# Altium PCB PCB-verbesserung_2025-05-29.pcbdoc
Units mil, origin at the board's own origin, x right, y up, seen from the top; angles counter-clockwise.
Board outline 3544.31 x 3372.2 mil, 2 copper layers (Top Layer, Bottom Layer); 8 components, 26 nets, 80 pads, 3 vias.
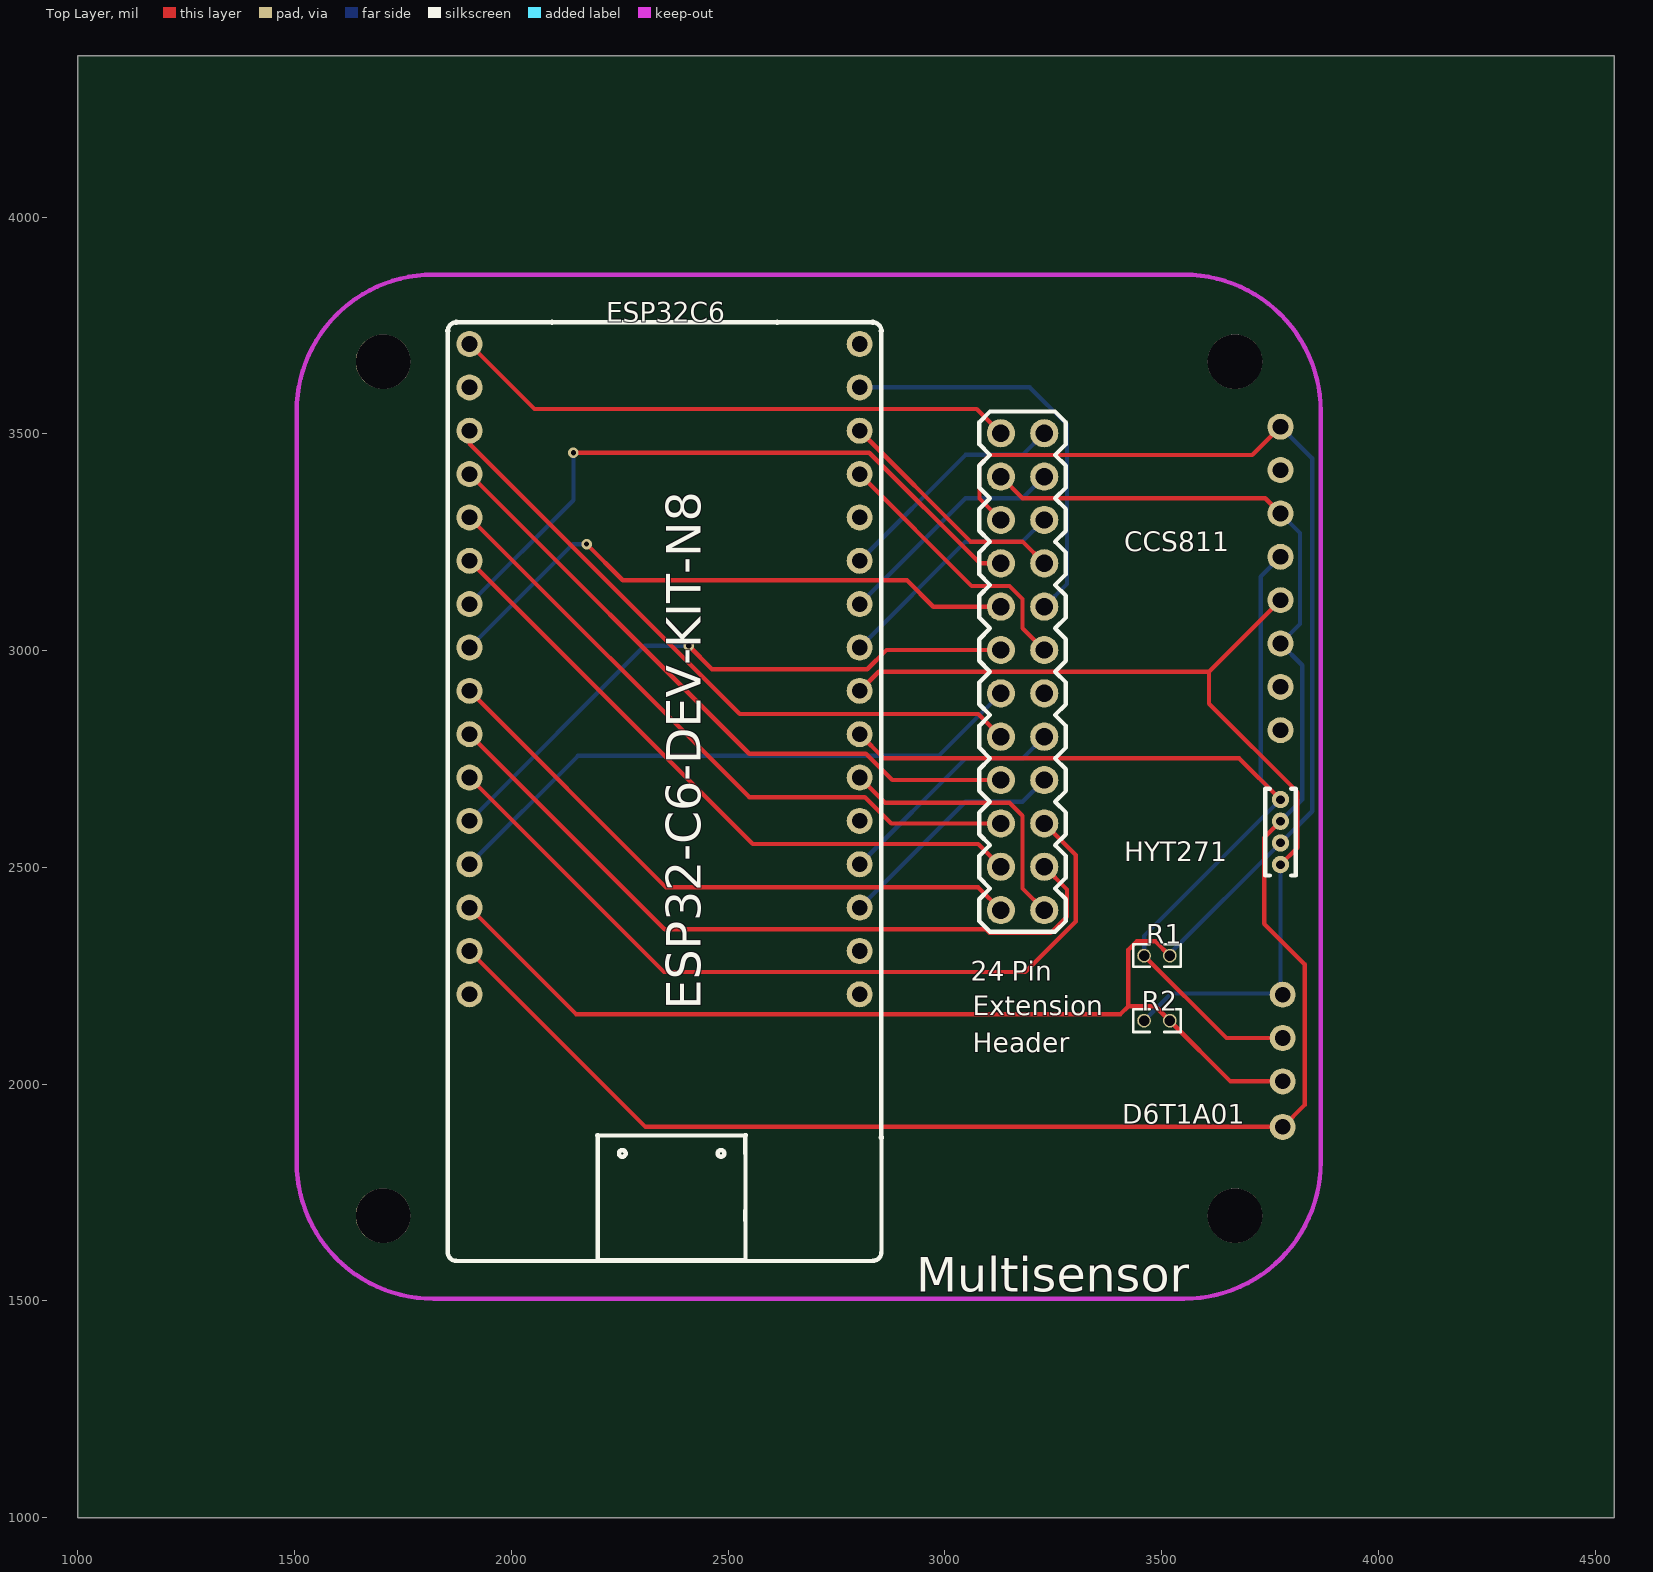
[diagram p0: Top Layer view]
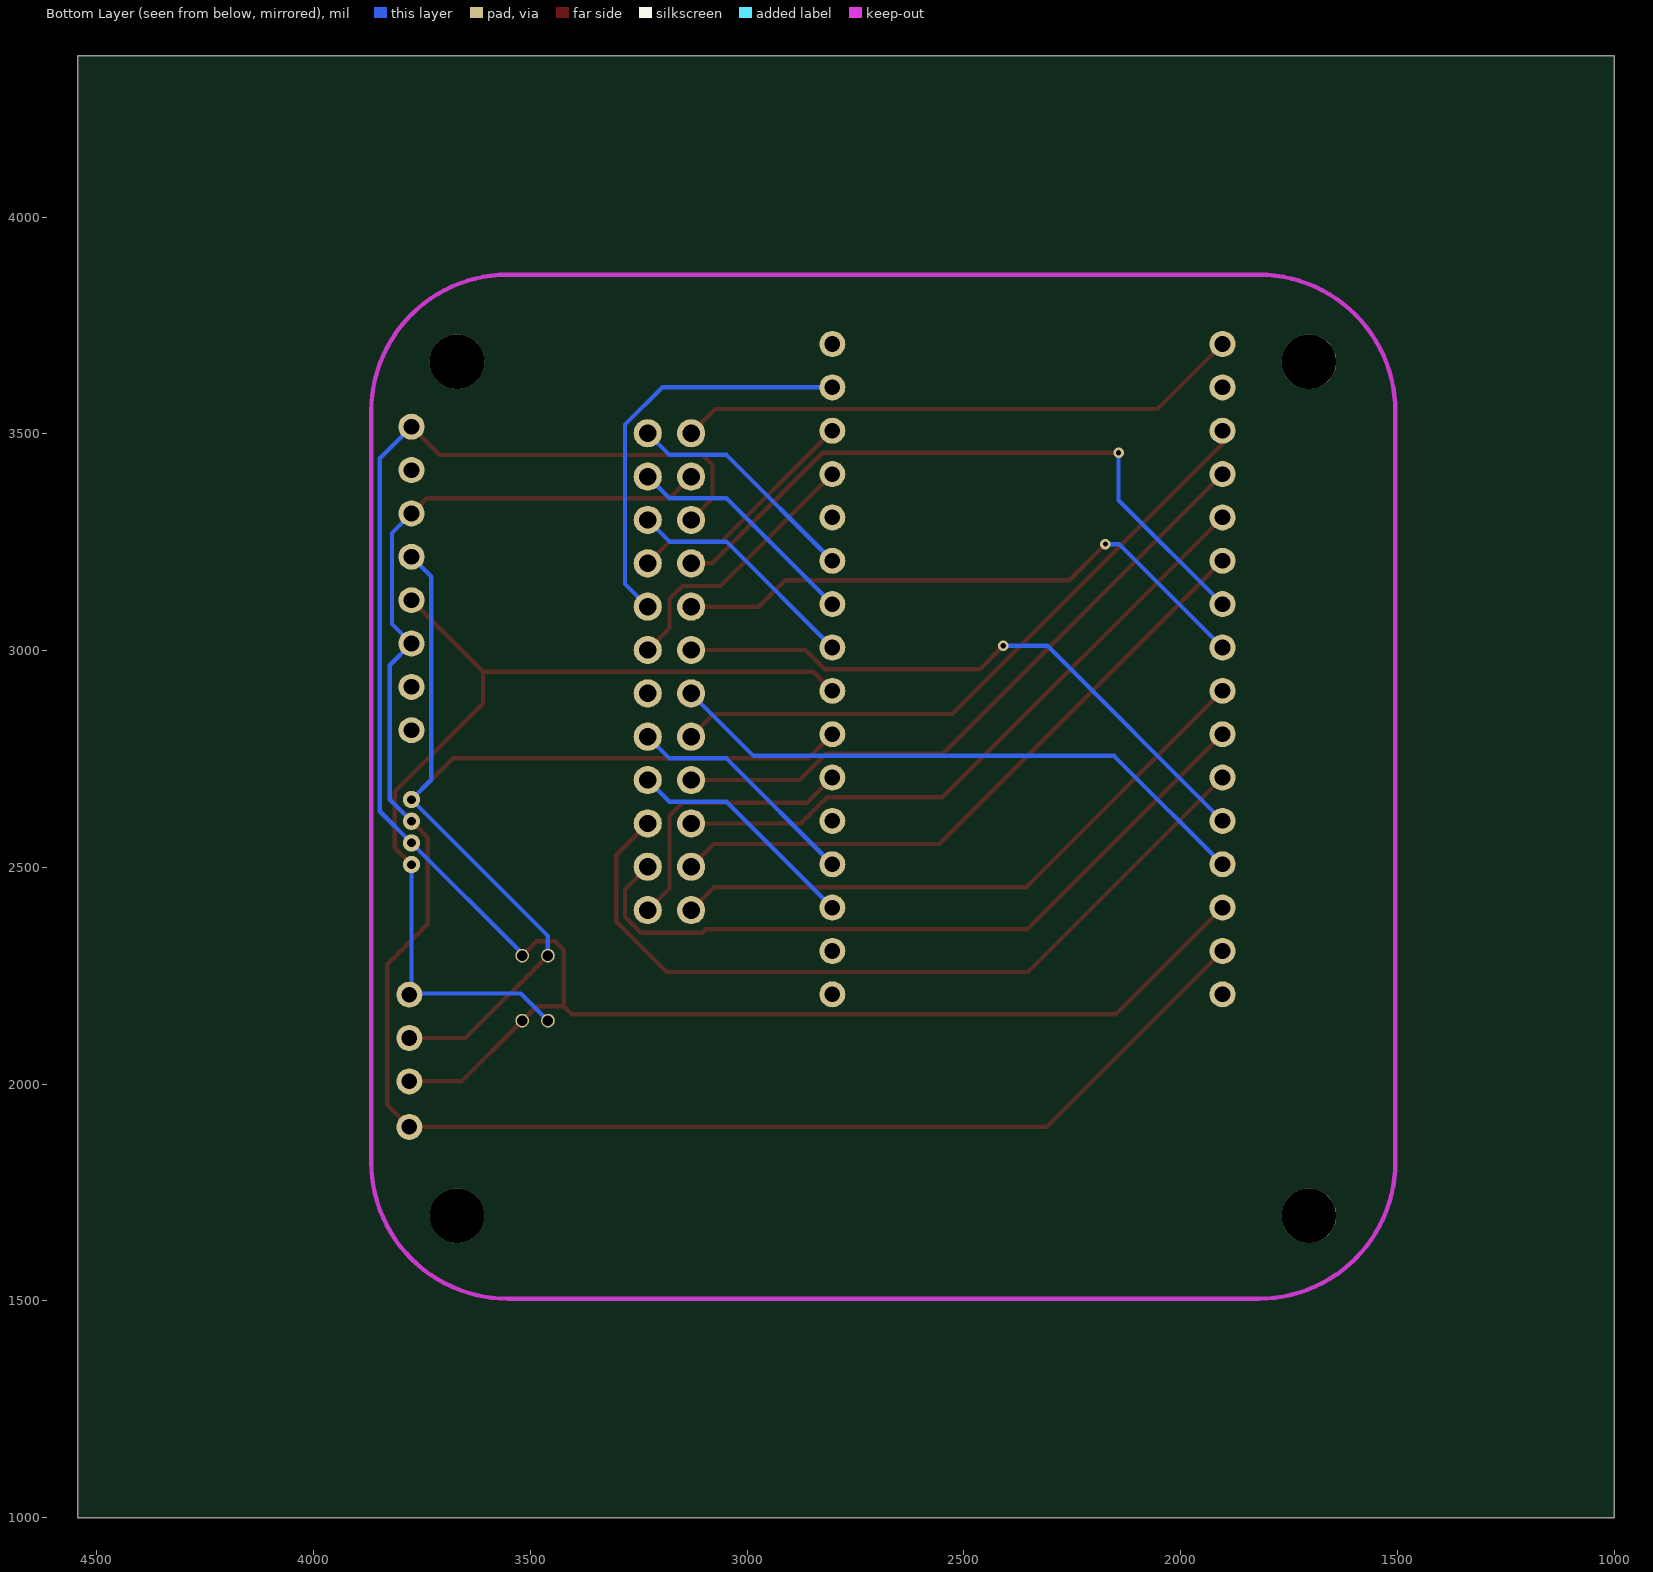
[diagram p1: Bottom Layer view, seen from below]

## Layer stack, top to bottom
Top Solder: solder mask 0.4, Solder Resist, Dk 3.5
Top Layer: signal copper 1.4
Dielectric1: dielectric 12.6, FR-4, Dk 4.8
Bottom Layer: signal copper 1.4
Bottom Solder: solder mask 0.4, Solder Resist, Dk 3.5

## Board outline
4544.31,1000 1000,1000 1000,4372.2 4544.31,4372.2

## Design rules (kind name [scope] priority, off if disabled: settings)
Clearance [All] p1: gap=10 ignorepadtopadclearanceinfootprint=FALSE
PolygonConnect [All] p1: connectstyle=Relief reliefconductorwidth=10 reliefentries=4 polygonreliefangle="90 Angle" airgapwidth=10
RoutingVias [All] p1: holewidth=28 width=50 viastyle="Through Hole" minholewidth=28 minwidth=50 maxholewidth=28 maxwidth=50
SolderMaskExpansion [All] p1: expansion=4 istentingtop=FALSE
Width [All] p1: maxlimit=10 minlimit=10 preferedwidth=10
30 further rules are at their usual default settings.

## Components (designator, comment, footprint, x,y, rotation, side; value= is the part's Value field where it differs from the comment)
24 "2X12 PIN HEADER MALE" "PIN-HEADER-210S-2X12P WK" 3229.41,3351.38 r270 top
CCS811 "CCS811 Joy-It" "CCS811 JOY-IT" 3774.41,3516.38 r0 top
D6T1A01 "D6T1A01" D6T1A01 3779.41,2206.38 r0 top
ESP32C6 "ESP32-C6-DEV-KIT" ESP32-C6-DEV-KIT-N8 1899.45,3706.33 r0 top
HYT271 "HYT271" HYT271 3774.41,2656.38 r270 top
R1 "4,7k" R0603 3489.41,2296.38 r0 top
R2 "4,7k" R0603 3489.41,2146.38 r0 top
? "" ? 3908.36,2581.38 r0 top

## Footprints (in the part's own frame and the unit in brackets; to place one, negate y for a bottom-side part, rotate by r counter-clockwise, add the part's x,y. Pads: shape width x height; smd on the part's side, far side on the other; paste and mask are expansions set on the pad)
"CCS811 JOY-IT" [mil]
  round 60 hole 36 paste-99999 mask+2: 1(0,0) 2(0,-100) 3(0,-200) 4(0,-300) 5(0,-400) 6(0,-500) 7(0,-600) 8(0,-700)
D6T1A01 [mil]
  round 60 hole 36 paste-99999 mask+2: 1(0,0) 2(0,-100) 3(0,-200) 4(0,-305)
ESP32-C6-DEV-KIT-N8 [mil]
  round 60 hole 36 paste-99999 mask+2: 1(4.26,0.85) 2(4.26,-99.15) 3(4.26,-199.15) 4(4.26,-299.15) 5(4.26,-399.15) 6(4.26,-499.15) 7(4.26,-599.15) 8(4.26,-699.15) 9(4.26,-799.15) 10(4.26,-899.15) 11(4.26,-999.15) 12(4.26,-1099.15) 13(4.26,-1199.15) 14(4.26,-1299.15) 15(4.26,-1399.15) 16(4.26,-1499.15) 17(904.26,-1499.15) 18(904.26,-1399.15) 19(904.26,-1299.15) 20(904.26,-1199.15) 21(904.26,-1099.15) 22(904.26,-999.15) 23(904.26,-899.15) 24(904.26,-799.15) 25(904.26,-699.15) 26(904.26,-599.15) 27(904.26,-499.15) 28(904.26,-399.15) 29(904.26,-299.15) 30(904.26,-199.15) 31(904.26,-99.15) 32(904.26,0.85)
  silkscreen extent -47,-2114 956,52
HYT271 [mil]
  silkscreen extent -25,-35 175,35
"PIN-HEADER-210S-2X12P WK" [mil]
  round 65 hole 40 paste-99999 mask+4: 1(-150,0) 2(-50,0) 3(50,0) 4(150,0) 5(250,0) 6(350,0) 7(450,0) 8(550,0) 9(650,0) 10(750,0) 11(850,0) 12(950,0) 13(-150,-100) 14(-50,-100) 15(50,-100) 16(150,-100) 17(250,-100) 18(350,-100) 19(450,-100) 20(550,-100) 21(650,-100) 22(750,-100) 23(850,-100) 24(950,-100)
  silkscreen extent -200,-150 1000,50
R0603 [mm]
  round 0.806 hole 0.61 paste-2539.97 mask+0.051: 1(-0.753,0) 2(0.753,0)
  silkscreen extent -1.39,-0.66 1.39,0.66
? [mil]

## Free pads (board coordinates)
  round 40 hole 19.84 paste-99999 mask+2: 1(3774.41,2656.38) 2(3774.41,2606.38) 3(3774.41,2556.38) 4(3774.41,2506.38)
  round 125.98 hole 125.98 unplated paste-99999: ""(1704.41,1696.38) ""(1704.41,3666.38) ""(3669.41,1696.38) ""(3669.41,3666.38)

## Via types
v1: diameter 24.02, hole 12.01, Top Layer to Bottom Layer, 3 vias

## Nets (pads, with @x,y where several pads share a name; then routed paths per layer and width w, separated by ;. In a path a pad name is that pad's centre, name@x,y a point inside that pad or via, vN(x,y) a via of type N, cw(c..) or ccw(c..) an arc to the next point about the centre after c; other vN are vias at no path point)
3V3: 24.13 ESP32C6.1 | length 1310.9
  Top Layer w10: ESP32C6.1 2053.66,3557.23 3073.56,3557.23 24.13
5V0: 24.15 CCS811.1 D6T1A01.3 ESP32C6.14 pad.3 R1.2 R2.2 | length 4568.9
  Top Layer w10: ESP32C6.14 2149.3,2161.59 3405.34,2161.59 3423.53,2179.78 ; 24.15 3079.94,3350.85 3079.94,3428.18 3103.14,3451.38 3709.41,3451.38 CCS811.1 ; R1.2 3486.13,2329.32 3442.72,2329.32 3423.53,2310.13 3423.53,2179.78 ; D6T1A01.3 3659.07,2006.38 R2.2 3485.67,2179.78 3423.53,2179.78
  Bottom Layer w10: R1.2 3519.07,2301.04 pad.3 3847.47,2629.44 3847.47,3443.32 CCS811.1
GND: 24.14 CCS811.3 CCS811.6 D6T1A01.4 ESP32C6.15 pad.2 | length 4293.2
  Top Layer w10: ESP32C6.15 2309.51,1901.38 D6T1A01.4 3830.05,1952.02 3830.05,2276.37 3736.56,2369.86 3736.56,2568.53 pad.2 ; 24.14 3179.35,3351.44 3739.35,3351.44 CCS811.3
  Bottom Layer w10: pad.2 3824.49,2656.46 3824.49,2966.3 CCS811.6 3819.48,3061.45 3819.48,3271.31 CCS811.3
GPIO0: 24.16 ESP32C6.7 | length 1540.3
  Top Layer w10: v1(2143.46,3456.52) 2825.96,3456.52 3081.1,3201.38 24.16
  Bottom Layer w10: ESP32C6.7 2143.46,3346.93 v1(2143.46,3456.52)
GPIO1: 24.17 ESP32C6.8 | length 1384.3
  Top Layer w10: v1(2173.7,3245.69) 2257.29,3162.1 2912.89,3162.1 2973.61,3101.38 24.17
  Bottom Layer w10: ESP32C6.8 2142.22,3245.69 v1(2173.7,3245.69)
GPIO2: 24.18 ESP32C6.12 | length 1433.6
  Top Layer w10: v1(2409.29,3011.09) 2463.2,2957.18 2821.39,2957.18 2865.59,3001.38 24.18
  Bottom Layer w10: ESP32C6.12 2307.62,3011.09 v1(2409.29,3011.09)
GPIO3: 24.19 ESP32C6.13 | length 1389
  Bottom Layer w10: ESP32C6.13 2153.71,2757.18 2985.21,2757.18 24.19
GPIO4: 24.20 ESP32C6.3 | length 1535.5
  Top Layer w10: ESP32C6.3 1903.71,3477.39 2527.3,2853.8 3076.99,2853.8 24.20
GPIO5: 24.21 ESP32C6.4 | length 1518.1
  Top Layer w10: ESP32C6.4 2548.79,2762.1 2817.99,2762.1 2878.71,2701.38 24.21
GPIO6: 24.22 ESP32C6.5 | length 1518.1
  Top Layer w10: ESP32C6.5 2548.79,2662.1 2815.57,2662.1 2876.29,2601.38 24.22
GPIO7: 24.23 ESP32C6.6 | length 1518.1
  Top Layer w10: ESP32C6.6 2557.09,2553.8 3076.99,2553.8 24.23
GPIO8: 24.24 ESP32C6.9 | length 1435.2
  Top Layer w10: ESP32C6.9 2357.09,2453.8 3076.99,2453.8 24.24
GPIO9: 24.12 ESP32C6.22 | length 650.5
  Top Layer w10: ESP32C6.22 2861.93,2648.96 3149.41,2648.96 3179.41,2618.96 3179.41,2451.38 24.12
GPIO10: 24.11 ESP32C6.10 | length 1720.4
  Top Layer w10: ESP32C6.10 2353.71,2357.18 3094.77,2357.18 3103.08,2348.87 3244.59,2348.87 3281.83,2386.11 3281.83,2448.96 24.11
GPIO11: 24.10 ESP32C6.11 | length 1888.9
  Top Layer w10: ESP32C6.11 2352.22,2258.67 3185.79,2258.67 3302.11,2374.99 3302.11,2528.68 24.10
GPIO12: 24.9 ESP32C6.19 | length 547.6
  Bottom Layer w10: ESP32C6.19 3047.91,2651.38 3179.41,2651.38 24.9
GPIO13: 24.8 ESP32C6.20 | length 547.6
  Bottom Layer w10: ESP32C6.20 3047.91,2751.38 3179.41,2751.38 24.8
GPIO14: 24.7
GPIO15: 24.6 ESP32C6.29 | length 633.4
  Top Layer w10: ESP32C6.29 3061.93,3148.96 3149.4,3148.96 3179.41,3118.95 3179.41,3051.38 24.6
GPIO16: 24.5 ESP32C6.31 | length 955.5
  Bottom Layer w10: ESP32C6.31 3196.17,3607.18 3281.83,3521.52 3281.83,3153.8 24.5
GPIO17: 24.4 ESP32C6.30 | length 552.4
  Top Layer w10: ESP32C6.30 3059.48,3251.41 3179.38,3251.41 24.4
GPIO20: 24.3 ESP32C6.25 | length 547.6
  Bottom Layer w10: ESP32C6.25 3047.91,3251.38 3179.41,3251.38 24.3
GPIO21: 24.2 ESP32C6.26 | length 547.6
  Bottom Layer w10: ESP32C6.26 3047.91,3351.38 3179.41,3351.38 24.2
GPIO22: 24.1 ESP32C6.27 | length 547.6
  Bottom Layer w10: ESP32C6.27 3047.97,3451.44 3179.47,3451.44 24.1
SCL: CCS811.5 D6T1A01.1 ESP32C6.24 pad.4 R2.1 | length 2247
  Top Layer w10: ESP32C6.24 2847.91,2951.38 3609.41,2951.38 ; pad.4 3813.36,2545.33 3813.36,2673.65 3609.41,2877.6 3609.41,2951.38 ; CCS811.5 3609.41,2951.38
  Bottom Layer w10: R2.1@3459.75,2146.38 3522.25,2208.88 D6T1A01.1@3774.41,2208.88 ; pad.4 D6T1A01.1@3774.41,2208.88 ; D6T1A01.1 3776.91,2208.88 D6T1A01.1@3774.41,2208.88
SDA: CCS811.4 D6T1A01.2 ESP32C6.23 pad.1 R1.1 | length 2519.7
  Top Layer w10: ESP32C6.23 2859.51,2751.38 3679.41,2751.38 pad.1 ; R1.1@3459.75,2296.38 3649.75,2106.38 D6T1A01.2
  Bottom Layer w10: R1.1@3459.75,2296.38 3459.75,2341.72 pad.1 3728.69,2702.1 3728.69,3170.66 CCS811.4
pads on no net: CCS811.2 CCS811.7 CCS811.8 ESP32C6.2 ESP32C6.16 ESP32C6.17 ESP32C6.18 ESP32C6.21 ESP32C6.28 ESP32C6.32

## Keep-outs
Keep-Out Layer:
  lines w10: 1505,1819.96 ccw(c1819.96,1819.96) 1819.96,1505 ; 1505,3552.24 cw(c1819.96,3552.24) 1819.96,3867.2 ; 3552.24,1505 ccw(c3552.24,1819.96) 3867.2,1819.96 ; 3552.24,3867.2 cw(c3552.24,3552.24) 3867.2,3552.24

## Silkscreen, mask and mechanical layers (free items; w line width, h text height)
Top Overlay:
  text "Pin" at 3154.41,2238.88 h45
  text "Extension" at 3064.41,2158.88 h45
  text "Header" at 3064.41,2073.88 h45
  text "Multisensor" at 2934.41,1521.38 h80

## Text inside footprints (layer, text, board x,y; h text height)
ESP32C6: Top Overlay "ESP32-C6-DEV-KIT-N8" at 2436.57,2171.47 h80 r90